# Altium PCB MS1050_EVB_V2.0.PcbDoc
Units mm, origin at the board's own origin, x right, y up, seen from the top; angles counter-clockwise.
Board outline 72.28 x 84 mm, 2 copper layers (Top Layer, Bottom Layer); 37 components, 33 nets, 163 pads, 273 vias.
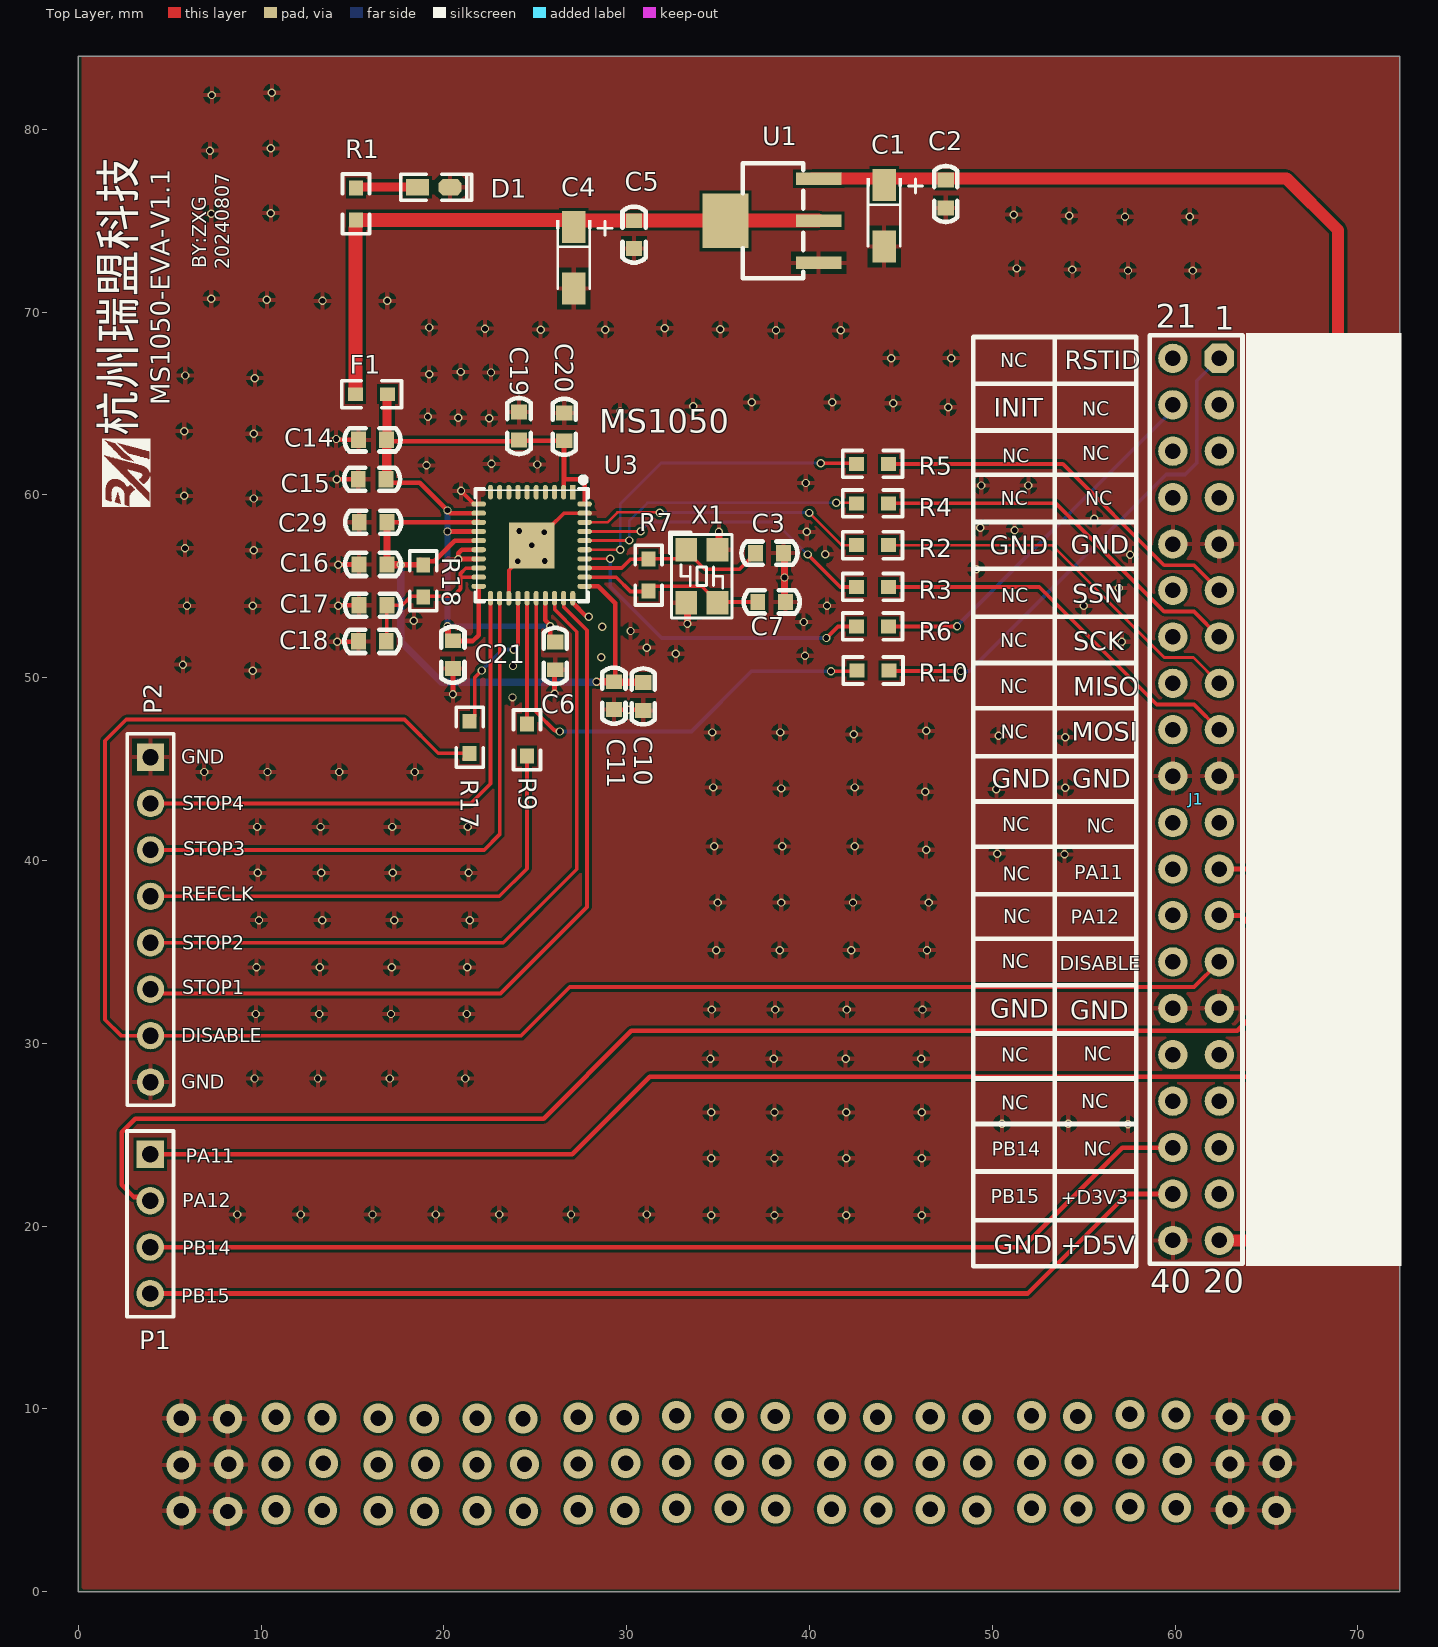
[diagram p0: Top Layer view]
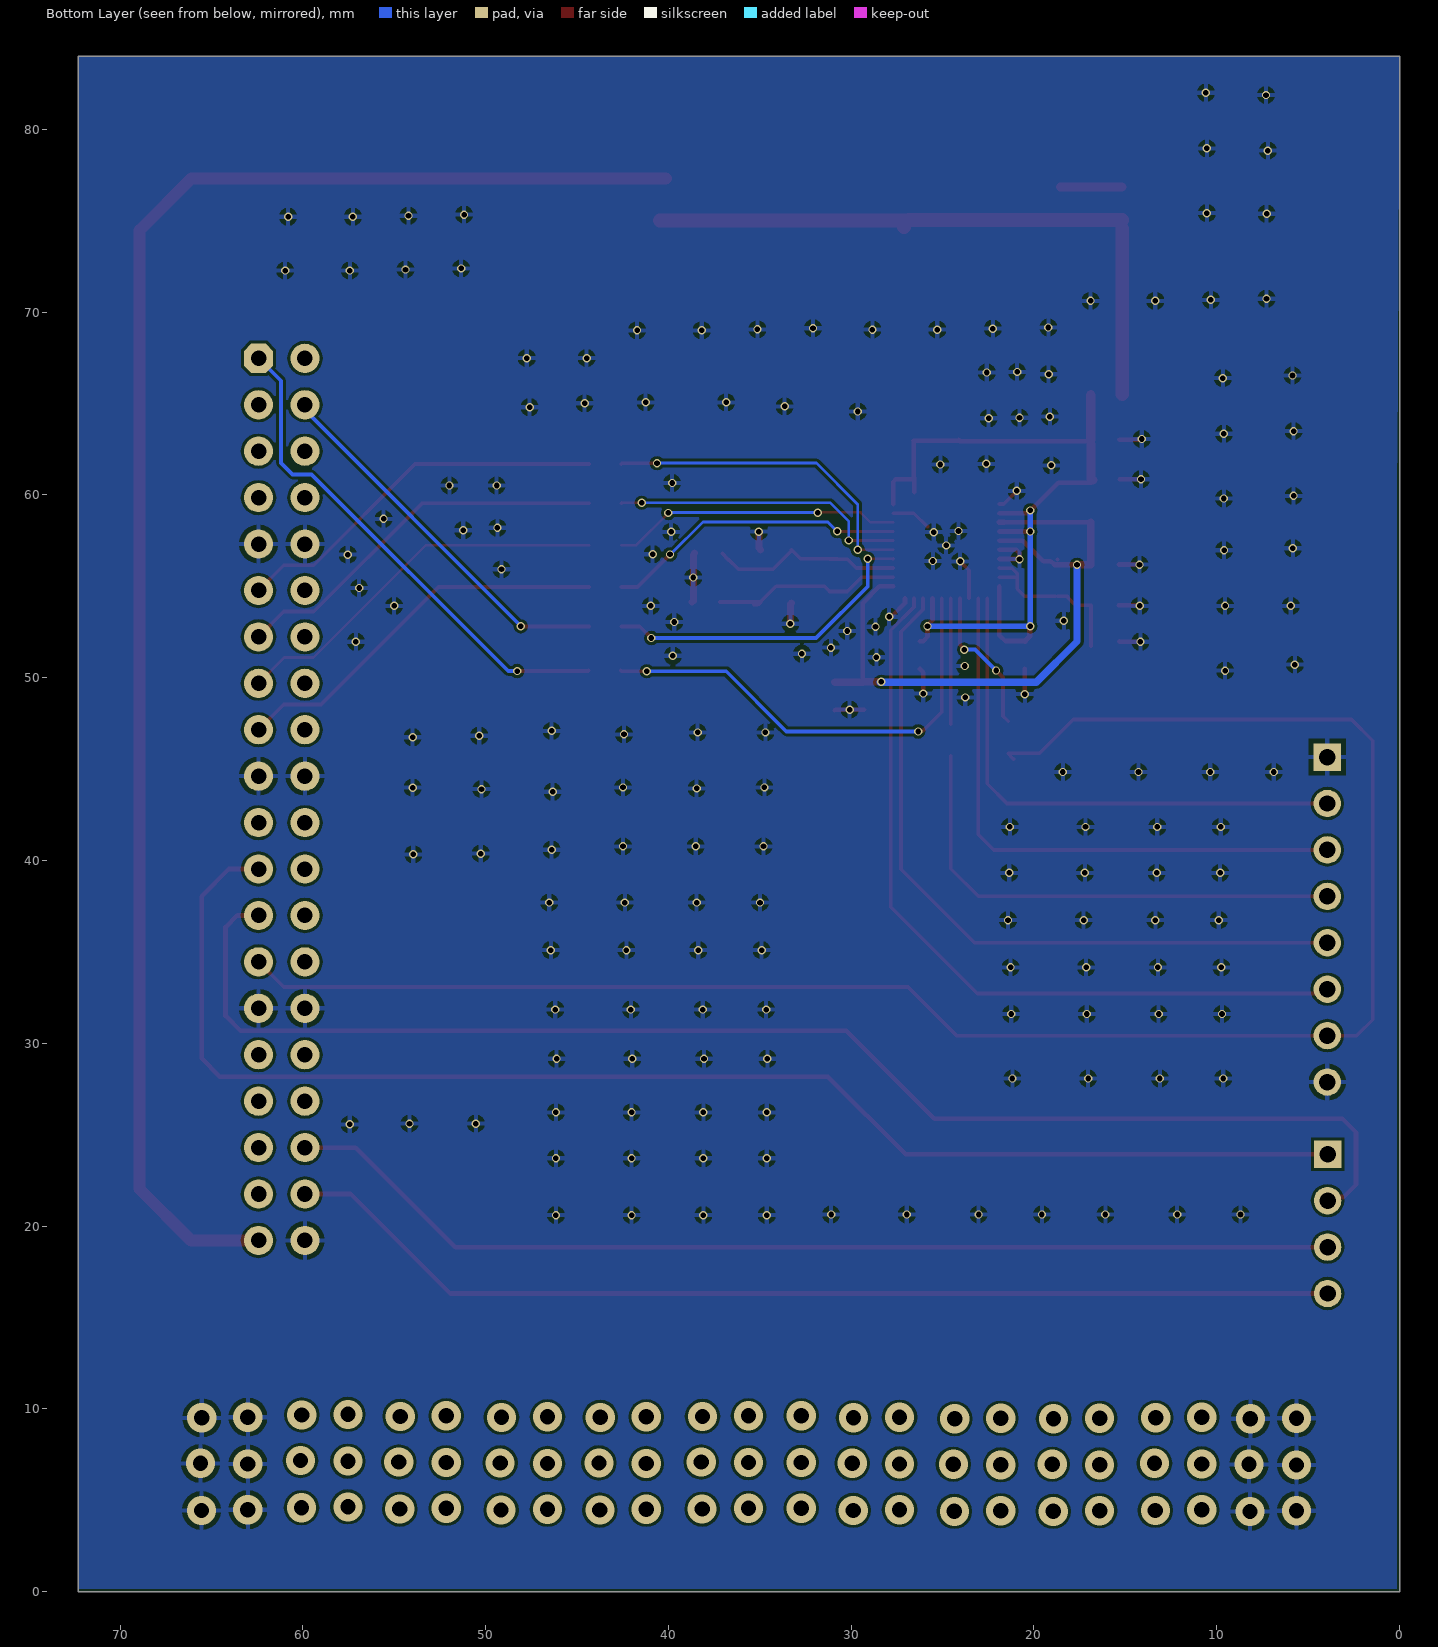
[diagram p1: Bottom Layer view, seen from below]

## Layer stack, top to bottom
Top Solder: solder mask 0.0102, Solder Resist, Dk 3.5
Top Layer: signal copper 0.0356
Dielectric 1: dielectric 0.32, FR-4, Dk 4.8
Bottom Layer: signal copper 0.0356
Bottom Solder: solder mask 0.0102, Solder Resist, Dk 3.5

## Board outline
0,0 72.282,0 72.282,0.031 72.282,84 0,84

## Design rules (kind name [scope] priority, off if disabled: settings)
Clearance [All] p1: gap=0.152 ignorepadtopadclearanceinfootprint=FALSE except(0: Arc-Hole Track-Hole SMDPad-Hole THPad-Hole Via-Hole Fill-Hole Poly-Hole Region-Hole Text-Hole)
MinimumSolderMaskSliver [All] p1: minsoldermaskwidth=0.102
PolygonConnect [All] p1: connectstyle=Relief reliefconductorwidth=0.254 reliefentries=4 polygonreliefangle="90 Angle" airgapwidth=0.254
RoutingVias [All] p1: holewidth=0.711 width=1.27 viastyle="Through Hole" minholewidth=0.711 minwidth=1.27 maxholewidth=0.711 maxwidth=1.27
SilkToSilkClearance [All] p1: silktosilkclearance=0.102
SilkToSolderMaskClearance [IsPad] p1: minsilkscreentomaskgap=0.102 clearancetoexposedcopper=TRUE
SolderMaskExpansion [All] p1: expansion=0.102 istentingtop=FALSE
Width [All] p1: maxlimit=1.27 minlimit=0.152 preferedwidth=0.203
27 further rules are at their usual default settings.

## Components (designator, comment, footprint, x,y, rotation, side; value= is the part's Value field where it differs from the comment)
C1 "22uF" 3216 43.131,79.822 r270 top value=22uF\16V
C2 "0.1uF" 0603C 47.46,75.706 r90 top value=0.1uF\50V
C3 "8pF" 0603C 37.049,56.819 r0 top value=8pF\50V
C4 "22uF" 3216 26.152,77.518 r270 top value=22uF\16V
C5 "0.1uF" 0603c 30.404,73.482 r90 top value=0.1uF\50V
C6 "0.1uF" 0603c 26.096,51.96 r270 top value=0.1uF\50V
C7 "8pF" 0603C 37.175,54.149 r0 top value=8pF\50V
C10 "0.1uF" 0603C 30.904,48.219 r90 top value=0.1uF\50V
C11 "10uF" 0603C 29.301,49.783 r270 top value=10uF\50V
C14 "10uF" 0603C 15.332,63.018 r0 top value=10uF\10V
C15 "0.1uF" 0603C 15.311,60.86 r0 top value=0.1uF\50V
C16 "10uF" 0603C 15.357,56.201 r0 top value=10uF\10V
C17 "10uF" 0603C 15.357,53.966 r0 top value=10uF\10V
C18 "0.1uF" 0603C 15.324,51.993 r0 top value=0.1uF/50V
C19 "10uF" 0603C 24.11,64.535 r270 top value=10uF\10V
C20 "0.1uF" 0603C 26.585,64.494 r270 top value=0.1uF\50V
C21 "10uF" 0603c 20.495,52.022 r270 top value=10uF\10V
C29 "10uF" 0603C 16.897,58.51 r180 top value=10uF\10V
D1 "LED0" "LED 0603R" 19.451,76.833 r0 top
F1 "" R0603 15.169,65.513 r0 top
J1 "I/O" SIP20x2B 61.152,43.346 r270 top
P1 "Header 4" HDR1X4 3.934,23.933 r270 top
P2 "Header 8" HDR1X8 3.95,45.662 r270 top
R1 "1K" R0603 15.192,75.048 r90 top
R2 "0R" R0603 42.58,57.255 r0 top
R3 "0R" R0603 42.58,54.969 r0 top
R4 "0R" R0603 42.58,59.541 r0 top
R5 "0R" R0603 42.58,61.7 r0 top
R6 "0R" R0603 42.58,52.81 r0 top
R7 "1M" R0603 31.197,56.493 r270 top
R9 "Res2" R0603 24.546,45.723 r90 top value=0R
R10 "0R" R0603 42.606,50.397 r0 top
R17 "0R" R0603 21.411,47.619 r270 top
R18 "0R" R0603 18.873,56.176 r270 top
U1 "ASM1117-3.3" 1117 46.656,34.881 r90 top
U3 "MS1050" "QFN40 6X6_L" 24.8,57.255 r180 top
X1 "XTAL_4_PINS" "OSC 4025-4P" 34.11,55.553 r270 top value=8M_3225/+/-20PPM

## Footprints (in the part's own frame and the unit in brackets; to place one, negate y for a bottom-side part, rotate by r counter-clockwise, add the part's x,y. Pads: shape width x height; smd on the part's side, far side on the other; paste and mask are expansions set on the pad)
0603C [mil]
  rect 32x35 smd: 1(0,0) 2(60,0)
  silkscreen extent -30,-25 90,25
0603c [mil]
  rect 32x35 smd: 1(0,0) 2(60,0)
  silkscreen extent -30,-25 90,25
1117 [mm]
  rect 0.7x2.5 smd: 1(37.821,6.152) 2(40.121,6.152) 3(42.421,6.152)
  rect 3x2.5 smd: 2(40.121,11.252)
  silkscreen extent 36.97,7 43.27,10.3
3216 [mm]
  rect 1.758x1.296 smd paste+0 mask+0.051: 1(2.856,0.956) 2(6.228,0.956)
  silkscreen extent 2.48,0 6.22,3.05
HDR1X4 [mm] "Connector; Header; 4 Position"
  rect 1.5x1.5 hole 0.9: 1(0,0)
  round 1.5 hole 0.9: 2(2.54,0) 3(5.08,0) 4(7.62,0)
  silkscreen extent -1.27,-1.27 8.89,1.27
HDR1X8 [mm] "Connector; Header; 8 Position"
  rect 1.5x1.5 hole 0.9: 1(0,0)
  round 1.5 hole 0.9: 2(2.54,0) 3(5.08,0) 4(7.62,0) 5(10.16,0) 6(12.7,0) 7(15.24,0) 8(17.78,0)
  silkscreen extent -1.27,-1.27 19.05,1.27
"LED 0603R" [mil] "红色0603LED"
  rect 50x35 smd: 1(-35,0.26)
  oct 50x35 smd: 2(35,0.26)
  silkscreen extent -71,-28 81,28, body extent -31,-16 31,16, height 18
"OSC 4025-4P" [mm] "4*2.5*0.7mm(长宽高)"
  rect 1.3x1.2 smd: 1(-1.45,-0.85) 2(1.45,-0.85) 3(1.45,0.85) 4(-1.45,0.85)
  silkscreen extent -2.41,-1.75 2.29,1.65, body extent -2,-1.25 2,1.25, height 0.7
"QFN40 6X6_L" [mm] "40脚，长x宽x高：6x6x1mm，脚距：0.5mm"
  rect 0.275x0.8 smd mask+0.051: 1(-2.25,-2.898)
  oval 0.275x0.8 smd mask+0.051: 2(-1.75,-2.898) 3(-1.25,-2.898) 4(-0.75,-2.898) 5(-0.25,-2.898) 6(0.25,-2.898) 7(0.75,-2.898) 8(1.25,-2.898) 9(1.75,-2.898) 10(2.25,-2.898) 21(2.25,2.898) 22(1.75,2.898) 23(1.25,2.898) 24(0.75,2.898) 25(0.25,2.898) 26(-0.25,2.898) 27(-0.75,2.898) 28(-1.25,2.898) 29(-1.75,2.898) 30(-2.25,2.898)
  oval 0.8x0.275 smd mask+0.051: 11(2.898,-2.25) 12(2.898,-1.75) 13(2.898,-1.25) 14(2.898,-0.75) 16(2.898,0.25) 17(2.898,0.75) 18(2.898,1.25) 19(2.898,1.75) 20(2.898,2.25) 31(-2.898,2.25) 32(-2.898,1.75) 33(-2.898,1.25) 34(-2.898,0.75) 35(-2.898,0.25) 36(-2.898,-0.25) 37(-2.898,-0.75) 38(-2.898,-1.25) 39(-2.898,-1.75) 40(-2.898,-2.25)
  oval 0.8x0.275 smd paste+0 mask+0.051: 15(2.898,-0.25)
  rect 2.5x2.5 smd mask+0: ""(-0.007,0.016)
  silkscreen extent -3.1,-3.72 3.1,3.1
R0603 [mil]
  rect 32x30 smd mask+4: 1(0,0) 2(69,0)
  silkscreen extent -30,-29 99,29
SIP20x2B [mm]
  oct 1.6x1.6 hole 0.85: 1(-24.13,1.27)
  round 1.6 hole 0.85: 2(-21.59,1.27) 3(-19.05,1.27) 4(-16.51,1.27) 5(-13.97,1.27) 6(-11.43,1.27) 7(-8.89,1.27) 8(-6.35,1.27) 9(-3.81,1.27) 10(-1.27,1.27) 11(1.27,1.27) 12(3.81,1.27) 13(6.35,1.27) 14(8.89,1.27) 15(11.43,1.27) 16(13.97,1.27) 17(16.51,1.27) 18(19.05,1.27) 19(21.59,1.27) 20(24.13,1.27) 21(-24.13,-1.27) 22(-21.59,-1.27) 23(-19.05,-1.27) 24(-16.51,-1.27) 25(-13.97,-1.27) 26(-11.43,-1.27) 27(-8.89,-1.27) 28(-6.35,-1.27) 29(-3.81,-1.27) 30(-1.27,-1.27) 31(1.27,-1.27) 32(3.81,-1.27) 33(6.35,-1.27) 34(8.89,-1.27) 35(11.43,-1.27) 36(13.97,-1.27) 37(16.51,-1.27) 38(19.05,-1.27) 39(21.59,-1.27) 40(24.13,-1.27)
  silkscreen extent -25.53,-2.54 25.53,11.23

## Part data
C1 C4: library part "Cap Pol2", "Cap，22uF，20%，3216", LatestRevisionDate=17-Jul-2002, LatestRevisionNote="Re-released for DXP Platform.", PackageDescription="Polarized Capacitor; 2 Leads", PackageReference=POLAR0.8, Published=8-Jun-2000, Publisher="Altium Limited"
C2: library part Cap, "Cap，0.1 uF，1%，0603", LatestRevisionDate=17-Jul-2002, LatestRevisionNote="Re-released for DXP Platform.", PackageDescription="Radial Cap, Thru-Hole; 2 Leads; 0.3 in Pin Spacing", PackageReference=RAD-0.3, Published=8-Jun-2000, Publisher="Altium Limited"
C3 C7: library part Cap, "Cap，8pF，1%，0603", LatestRevisionDate=17-Jul-2002, LatestRevisionNote="Re-released for DXP Platform.", PackageDescription="Radial Cap, Thru-Hole; 2 Leads; 0.3 in Pin Spacing", PackageReference=RAD-0.3, Published=8-Jun-2000, Publisher="Altium Limited"
C5 C6 C10 C15 C18 C20: library part Cap, "Cap，0.1uF，1%，0603", LatestRevisionDate=17-Jul-2002, LatestRevisionNote="Re-released for DXP Platform.", PackageDescription="Radial Cap, Thru-Hole; 2 Leads; 0.3 in Pin Spacing", PackageReference=RAD-0.3, Published=8-Jun-2000, Publisher="Altium Limited"
C11 C14 C16 C17 C19 C21 C29: library part Cap, "Cap，10 uF，1%，0603", LatestRevisionDate=17-Jul-2002, LatestRevisionNote="Re-released for DXP Platform.", PackageDescription="Radial Cap, Thru-Hole; 2 Leads; 0.3 in Pin Spacing", PackageReference=RAD-0.3, Published=8-Jun-2000, Publisher="Altium Limited"
D1: "Green LED", LatestRevisionDate=08-Jul-2005, LatestRevisionNote="Mech Layer 1 removed.", PackageDescription="LED; 2 Leads", PackageReference=LED-0, Published=8-Jun-2000, Publisher="Altium Limited"
F1: library part Inductor, "Inductor", Code_IEC=1005, Code_JEITA=0402, LatestRevisionDate=29-May-2009, LatestRevisionNote="IPC-7351 Footprint Added.", PackageDescription="Chip Inductor", PackageReference=0402-A, Published=8-Jun-2000, Publisher="Altium Limited"
J1: library part "Header 20X2A", "Header, 40-Pin, Dual row"
P1: "Header, 4-Pin", LatestRevisionDate=17-Jul-2002, LatestRevisionNote="Re-released for DXP Platform.", Publisher="Altium Limited"
P2: "Header, 8-Pin", LatestRevisionDate=17-Jul-2002, LatestRevisionNote="Re-released for DXP Platform.", Publisher="Altium Limited"
R1: library part RES2, "RES，1.00K ohm，1%，0.125W，0603"
R2 R3 R4 R5 R6 R10 R17 R18: library part RES2_1, "RES，0 ohm，1%，0.125W，0603"
R7: library part Res2, "RES，1M ohm，1%，0.125W，0603", LatestRevisionDate=17-Jul-2002, LatestRevisionNote="Re-released for DXP Platform.", PackageDescription="Axial Device, Thru-Hole; 2 Leads; 0.4 in Pin Spacing", PackageReference=AXIAL-0.4, Published=8-Jun-2000, Publisher="Altium Limited"
R9: library part Res2_3, "Resistor", LatestRevisionDate=17-Jul-2002, LatestRevisionNote="Re-released for DXP Platform.", PackageDescription="Axial Device, Thru-Hole; 2 Leads; 0.4 in Pin Spacing", PackageReference=AXIAL-0.4, Published=8-Jun-2000, Publisher="Altium Limited"
U1: library part REG1117-3.3, "800mA and 1A Low Dropout Positive Regulator 2.85V, 3.3V, 5V, and Adjustable", ComponentLink1Description="Manufacturer Link", ComponentLink1URL=http://www.ti.com/, ComponentLink2Description=Datasheet, ComponentLink2URL=http://www-s.ti.com/sc/ds/REG1117.pdf, DatasheetVersion=Sep-1997, LatestRevisionDate=17-Jul-2002, LatestRevisionNote="Re-released for DXP Platform.", PackageDescription="SOT-223/SC-73; 4 Leads; Body 6.7 x 7.3 mm, inc. leads (LxW max)", PackageReference=ZZ311, PackageVersion=revC, Published=8-Jun-2000, Publisher="Altium Limited"
X1: "SMD3225, 8MHz, 12pF 10%", Manufacturer=SJK, Package="(2016) 2.0 x 1.6 x 0.45 mm", PartNumber=7U08000E12UCG

## Via types
v1: diameter 0.457, hole 0.305, Top Layer to Bottom Layer, tented both sides, 198 vias
v2: diameter 1.6, hole 0.838, Top Layer to Bottom Layer, 69 vias
v3: diameter 0.457, hole 0.305, Top Layer to Bottom Layer, 6 vias

## Nets (pads, with @x,y where several pads share a name; then routed paths per layer and width w, separated by ;. In a path a pad name is that pad's centre, name@x,y a point inside that pad or via, vN(x,y) a via of type N, cw(c..) or ccw(c..) an arc to the next point about the centre after c; other vN are vias at no path point)
+D5V: C1.1 C2.2 J1.20 U1.3 | length 90.1
  Top Layer w0.66: U1.3@40.14,77.317 44.087,77.317 46.505,77.317 47.464,77.317 66.095,77.317 68.926,74.486 68.926,22.021 66.121,19.216 J1.20
DISABLE: J1.14 P2.7 R17.2 | length 99.9
  Top Layer w0.203: R17.2@21.106,45.562 21.131,45.562 R17.2@21.411,45.841 ; R17.2 19.698,45.866 17.85,47.714 2.626,47.714 1.465,46.553 1.465,31.293 2.337,30.422 P2.7 24.232,30.422 26.888,33.077 61.043,33.077 J1.14
DVDD18O: C10.2 C11.1 C16.2 C29.1 R18.1 U3.13 U3.15 U3.31 | length 38.6
  Top Layer w0.203: R18.1@18.697,56.471 R18.1@18.723,56.471
  Top Layer w0.254: C29.1 U3.13@21.654,58.51 ; R18.1@18.872,56.176 19.081,56.385 19.483,56.385 20.603,57.505 U3.15 ; U3.31 28.455,55.005 29.372,54.087 C11.1@29.372,49.762
  Top Layer w0.305: v1(17.643,56.176) R18.1@18.872,56.176 ; U3.13@21.654,58.51 21.659,58.505 U3.13
  Top Layer w0.406: C16.2@16.881,56.176 v1(17.643,56.176) ; C16.2 16.889,56.209 16.889,58.502 C29.1 ; C11.1@29.301,49.774 28.358,49.774 v1(28.348,49.783) C11.1 ; C11.1@29.372,49.752 30.895,49.752 C10.2
  Bottom Layer w0.406: v1(17.643,56.176) 17.643,51.987 19.868,49.762 v1@28.42,49.762
DVDD33: C6.1 C14.2 C15.2 C19.2 C20.2 C21.1 F1.2 U3.2 U3.12 U3.14 U3.20 U3.27 U3.40 | length 46.8
  Top Layer w0.102: U3.20 U3.20@21.924,55.027
  Top Layer w0.203: U3.2 U3.2@26.557,60.16 ; 26.55,60.938 26.557,60.931 26.57,60.918
  Top Layer w0.254: C14.2 16.928,62.946 24.045,62.946 C19.2 ; C15.2@16.881,60.671 18.674,60.671 20.34,59.005 U3.12 ; v1@20.197,58.002 21.899,58.002 U3.14 ; C21.1@20.49,52.012 21.578,52.012 21.902,52.336 U3.20 ; C19.2@24.11,62.97 C20.2 ; U3.27 25.55,53.14 25.825,52.866 25.825,52.24 26.062,52.002 C6.1@26.233,52.002 ; U3.2@26.557,60.16 26.557,60.931 ; C20.2@26.57,62.912 26.57,60.918 26.628,60.86 27.55,60.86 27.699,60.711 U3.40
  Top Layer w0.305: v3(20.197,52.81) 20.226,52.781 20.226,52.276 C21.1@20.49,52.012
  Top Layer w0.508: C15.2@16.79,60.815 C15.2 16.881,60.905 C14.2@16.881,62.792 ; C14.2@16.888,63.018 F1.2@16.888,65.479
  Bottom Layer w0.254: v1(20.196,58.002) v1(20.196,58.002)
  Bottom Layer w0.305: v3(20.197,52.81) 20.197,57.971 v1(20.197,59.155) ; v3(20.197,52.81) v3@25.824,52.81
  other v3: 25.825,52.811
GND: C1.2 C2.1 C3.2 C4.2 C5.1 C6.2 C7.2 C10.1 C11.2 C14.1 C15.1 C16.1 C17.1 C18.1 C19.1 C20.1 C21.2 C29.2 D1.2 J1.5 J1.10 J1.15 J1.25 J1.30 J1.35 J1.40 P2.1 P2.8 U1.1 U3. U3.11 U3.16 U3.17 U3.23 U3.30 U3.39 X1.2 X1.4 | length 25
  Top Layer w0.152: v3(20.789,56.493) v3@20.795,56.499 ; U3.17@21.896,56.499 U3.17
  Top Layer w0.203: v1(20.94,60.226) 20.94,60.215 21.65,59.505 U3.11 ; U3.23 23.557,54.363 23.557,55.885 v1(24.038,56.366) ; U3.@25.816,58.271 25.839,58.271 26.573,59.005 U3.39
  Top Layer w0.254: v1(14.105,63.064) 14.151,63.018 C14.1 ; v1(14.144,60.864) 14.149,60.86 C15.1 ; v1(14.174,51.972) 15.304,51.972 C18.1 ; v1(14.214,53.931) 14.249,53.966 C17.1 ; v1(14.224,56.193) 14.232,56.201 C16.1 ; C21.2 v3(20.495,49.107) v3@20.518,49.084 ; v3(20.789,56.493) 20.789,56.819 20.975,57.005 U3.16 ; v3@20.795,56.499 U3.17@21.896,56.499 ; v1(26.055,49.137) 26.055,50.301 C6.2@26.233,50.478 ; U3.30 27.05,54.094 27.765,53.38 27.884,53.38 v1(27.923,53.341) ; C11.2 30.864,48.259 C10.1
  Top Layer w0.381: X1.2 33.326,54.036 v3(33.326,52.956) ; X1.4 35.048,57.092 v3(35.048,57.999) ; C3.2 38.636,56.756 38.636,54.212 C7.2
  other v1: 34.619,20.601 38.087,20.601 42.014,20.601 46.152,20.601 8.699,20.636 12.167,20.636 16.094,20.636 19.563,20.636 23.031,20.636 26.958,20.636 31.096,20.636 34.619,23.71 38.087,23.71 42.014,23.71 46.152,23.71 57.43,25.567 50.533,25.607 54.163,25.607 34.619,26.225 38.087,26.225 42.014,26.225 46.152,26.225 9.642,28.076 13.11,28.076 17.038,28.076 21.175,28.076 34.584,29.159 38.052,29.159 41.979,29.159 46.117,29.159 9.712,31.605 13.18,31.605 17.108,31.605 21.245,31.605 34.654,31.849 38.122,31.849 42.049,31.849 46.187,31.849 9.747,34.155 13.215,34.155 17.142,34.155 21.28,34.155 34.898,35.098 38.366,35.098 42.294,35.098 46.431,35.098 9.886,36.74 13.355,36.74 17.282,36.74 21.419,36.74 34.987,37.702 38.455,37.702 42.382,37.702 46.52,37.702 9.816,39.325 13.285,39.325 17.212,39.325 21.35,39.325 53.954,40.34 50.266,40.381 46.386,40.59 34.797,40.774 38.506,40.774 42.483,40.774 9.782,41.84 13.25,41.84 17.177,41.84 21.315,41.84 46.332,43.761 50.225,43.907 38.452,43.945 34.743,43.999 42.483,43.999 53.994,43.988 6.882,44.844 10.35,44.844 14.278,44.844 18.415,44.844 53.994,46.744 50.347,46.825 42.429,46.901 34.689,47.009 38.398,47.009 46.386,47.094 30.083,48.259 23.754,48.923 9.543,50.39 23.782,50.643 5.725,50.722 28.617,51.122 39.757,51.205 32.691,51.313 31.106,51.652 57.096,51.972 30.213,52.56 28.667,52.792 39.68,53.053 18.36,53.118 5.946,53.932 9.543,53.932 40.96,53.933 55.004,53.931 56.918,54.91 38.636,55.484 49.129,55.934 25.528,56.389 57.541,56.735 40.86,56.757 9.599,56.976 5.835,57.087 24.807,57.239 25.485,57.971 39.851,57.984 24.127,58.031 51.221,58.07 49.351,58.204 55.583,58.694 9.606,59.807 5.797,59.952 49.396,60.519 51.977,60.519 39.796,60.657 19.047,61.618 25.117,61.669 22.605,61.7 9.606,63.349 5.797,63.494 22.482,64.198 20.789,64.229 19.127,64.29 29.639,64.566 47.589,64.8 33.638,64.847 44.579,65.015 36.839,65.069 41.247,65.069 9.661,66.393 5.853,66.538 19.194,66.609 22.579,66.701 20.917,66.732 44.472,67.488 47.751,67.488 38.171,69.008 41.713,69.008 25.293,69.049 28.835,69.049 35.127,69.063 22.249,69.104 32.086,69.124 19.208,69.165 13.361,70.622 16.903,70.622 10.317,70.677 7.276,70.738 57.426,72.279 60.968,72.279 54.382,72.334 51.341,72.395 57.263,75.222 60.805,75.222 54.219,75.277 51.178,75.338 7.27,75.388 10.536,75.419 7.201,78.842 10.536,78.961 7.305,81.881 10.591,82.005
  other v2: 8.178,4.39 5.638,4.429 65.546,4.443 63.006,4.483 5.638,6.934 8.231,6.967 63.006,6.987 65.599,7.02 8.158,9.458 5.638,9.491 65.526,9.512 63.006,9.545
INTN: J1.22 R6.2 | length 20.8
  Top Layer w0.203: R6.2 v1(48.077,52.81)
  Bottom Layer w0.203: v1(48.077,52.81) 48.077,52.837 59.882,64.643 J1.22
MISO: J1.8 R2.2 | length 21.2
  Top Layer w0.152: R2.2 53.266,57.255 59.414,51.106 61.013,51.106 J1.8
MOSI: J1.9 R3.2 | length 21.3
  Top Layer w0.203: R3.2 52.572,54.969 59,48.541 61.038,48.541 J1.9
NetC3_1: C3.1 R7.1 U3.33 X1.1 | length 10.7
  Top Layer w0.203: U3.33 29.726,56.005 30.206,56.485 30.729,56.485 30.737,56.493 R7.1 31.209,56.504 32.761,56.504 X1.1 33.26,56.953 34.274,55.938 36.168,55.938 36.707,56.476 36.745,56.476 37.049,56.781 C3.1 C3.1@36.961,56.731
NetC4_1: C4.1 C5.2 F1.1 R1.1 U1.2 | length 34.6
  Top Layer w0.762: F1.1 15.169,74.571 ; R1.1 26.841,75.048 27.108,74.781 C4.1 ; C4.1@27.108,75.017 30.404,75.017 U1.2@40.473,75.017
NetC7_1: C7.1 R7.2 U3.32 X1.3 | length 10.8
  Top Layer w0.203: U3.32 27.706,55.498 29.427,55.498 30.21,54.715 R7.2@31.197,54.715 ; R7.2 31.464,55.007 34.106,55.007 34.985,54.128 35.107,54.005 X1.3@35.321,54.005 ; X1.3@35.034,54.029 X1.3 35.006,54.149 C7.1
NetC17_2: C17.2 C18.2 R18.2 U3.18 U3.19 | length 9.5
  Top Layer w0.203: C18.2@16.881,51.731 C17.2 17.719,53.966 18.151,54.398 ; 18.151,54.461 R18.2@18.704,54.461 ; R18.2@18.799,54.466 20.515,54.466 20.912,54.863 20.912,55.505 ; U3.19 20.912,55.505 ; U3.18 21.888,55.991 21.201,55.991 20.912,55.702 20.912,55.505
NetD1_1: D1.1 R1.2 | length 3.4
  Top Layer w0.508: R1.2@15.192,76.85 D1.1@18.551,76.85
NetR2_1: R2.1 U3.38 | length 15.9
  Top Layer w0.152: U3.38 28.948,58.505 29.494,59.05 31.805,59.05 v1(31.82,59.036) ; v1(39.998,59.017) 41.76,57.255 R2.1
  Bottom Layer w0.152: v1(31.82,59.036) 39.979,59.036 v1(39.998,59.017)
NetR3_1: R3.1 U3.37 | length 16.6
  Top Layer w0.152: U3.37 27.703,58.009 30.762,58.009 v1(30.766,58.013)
  Top Layer w0.203: v1(39.911,56.746) 41.688,54.969 R3.1
  Bottom Layer w0.152: v1(30.766,58.013) 31.283,58.53 38.112,58.53 39.896,56.746 v1(39.911,56.746)
NetR4_1: R4.1 U3.36 | length 16.4
  Top Layer w0.152: U3.36 27.703,57.509 30.132,57.509 v1(30.137,57.514) ; v1(41.457,59.572) R4.1@42.549,59.572
  Top Layer w0.203: R4.1@42.549,59.572 R4.1
  Bottom Layer w0.152: v1(30.137,57.514) 30.137,58.569 31.139,59.572 v1(41.457,59.572)
NetR5_1: R5.1 U3.35 | length 18.3
  Top Layer w0.152: U3.35@27.703,57 29.639,57 v1(29.643,56.996)
  Top Layer w0.203: v1(40.622,61.744) 42.536,61.744 R5.1
  Bottom Layer w0.152: v1(29.643,56.996) 29.643,59.497 31.891,61.744 v1(40.622,61.744)
NetR6_1: R6.1 U3.34 | length 17.8
  Top Layer w0.152: U3.34@27.703,56.509 29.094,56.509 v1(29.098,56.513)
  Top Layer w0.203: U3.34 U3.34@27.703,56.509 ; v1(40.929,52.175) 41.564,52.81 R6.1
  Bottom Layer w0.203: v1(29.098,56.513) 29.098,54.998 31.921,52.175 v1(40.929,52.175)
NetR9_2: R9.2 U3.25 | length 6.9
  Top Layer w0.203: R9.2 24.55,47.48 U3.25
NetR10_1: R10.1 U3.26 | length 25.6
  Top Layer w0.203: U3.26 25.05,48.118 26.058,47.111 26.283,47.111 v1(26.332,47.062) ; v1(41.18,50.352) 42.561,50.352 R10.1
  Bottom Layer w0.203: v1(26.332,47.062) 33.545,47.062 36.835,50.352 v1(41.18,50.352)
NetR17_1: R17.1 U3.24 | length 8.2
  Top Layer w0.203: R17.1 21.69,47.898 21.69,50.013 v1(22.073,50.397) ; v1(23.815,51.542) 23.815,51.569 24.05,51.804 U3.24
  Bottom Layer w0.203: v1(22.073,50.397) 23.218,51.542 v1(23.815,51.542)
PA11: J1.12 P1.1 | length 76.4
  Top Layer w0.254: P1.1 27.022,23.933 31.27,28.181 64.539,28.181 65.533,29.175 65.533,38.05 64.046,39.536 J1.12
PA12: J1.13 P1.2 | length 76.2
  Top Layer w0.254: P1.2 3.734,21.593 3.043,21.593 2.381,22.255 2.381,25.143 3.12,25.882 25.46,25.882 30.261,30.682 31.09,30.682 63.41,30.682 64.227,31.499 64.227,36.363 63.593,36.996 J1.13
PB14: J1.38 P1.3 | length 58.2
  Top Layer w0.254: P1.3 51.668,18.853 57.112,24.296 J1.38
PB15: J1.39 P1.4 | length 58.2
  Top Layer w0.254: P1.4 51.934,16.313 57.378,21.756 J1.39
REFCLK: P2.4 R9.1 | length 27.4
  Top Layer w0.203: P2.4 23.031,38.042 24.546,39.556 R9.1
RSTIDX: J1.1 R10.2 | length 27.8
  Top Layer w0.203: R10.2 44.387,50.368 v1(48.275,50.368)
  Bottom Layer w0.203: v1(48.275,50.368) 48.76,50.368 59.518,61.126 60.566,61.126 61.194,61.755 61.194,66.248 J1.1
SCK: J1.7 R4.2 | length 21.1
  Top Layer w0.203: R4.2 53.484,59.541 59.404,53.621 61.038,53.621 J1.7
SSN: J1.6 R5.2 | length 21
  Top Layer w0.203: R5.2 53.865,61.7 59.404,56.161 61.038,56.161 J1.6
STOP1: P2.6 U3.29 | length 43.4
  Top Layer w0.203: P2.6 4.188,32.723 23.095,32.723 27.831,37.459 27.831,52.604 26.564,53.871 26.564,54.343 U3.29
STOP2: P2.5 U3.28 | length 40.3
  Top Layer w0.203: P2.5 23.244,35.502 27.269,39.526 27.269,52.523 26.064,53.728 26.064,54.343 U3.28
STOP3: P2.3 U3.22 | length 32.4
  Top Layer w0.203: P2.3 22.203,40.582 23.05,41.429 U3.22
STOP4: P2.2 U3.21 | length 29.2
  Top Layer w0.203: P2.2 21.47,43.122 22.556,44.208 22.556,54.351 U3.21
pads on no net: J1.2 J1.3 J1.4 J1.11 J1.16 J1.17 J1.18 J1.19 J1.21 J1.23 J1.24 J1.26 J1.27 J1.28 J1.29 J1.31 J1.32 J1.33 J1.34 J1.36 J1.37 U3.1 U3.3 U3.4 U3.5 U3.6 U3.7 U3.8 U3.9 U3.10
copper on no net:
  other v2: 18.946,4.393 24.353,4.393 13.354,4.446 16.406,4.433 21.813,4.433 29.892,4.446 43.746,4.466 49.153,4.466 10.814,4.486 27.352,4.486 41.206,4.506 46.613,4.506 38.154,4.519 54.692,4.519 35.614,4.559 52.152,4.559 32.732,4.566 60.072,4.599 57.532,4.638 16.406,6.937 21.813,6.937 18.999,6.971 24.406,6.971 10.814,6.99 27.352,6.99 41.206,7.01 46.613,7.01 13.407,7.024 29.945,7.024 43.799,7.044 49.206,7.044 32.732,7.07 35.614,7.063 52.152,7.063 38.207,7.097 54.745,7.097 57.532,7.143 60.125,7.176 18.926,9.462 24.333,9.462 16.406,9.495 21.813,9.495 13.334,9.515 29.872,9.515 43.726,9.535 49.133,9.535 10.814,9.548 27.352,9.548 38.134,9.588 41.206,9.568 46.613,9.568 54.672,9.588 32.732,9.628 35.614,9.621 52.152,9.621 60.052,9.667 57.532,9.7

## Polygon pours and split planes (outlines as drawn)
GND on Bottom Layer "GND_L02_P007" (solid, remove dead copper, pour order 7): 0.129,61.766 0.142,61.753 0.142,0.161 72.282,0.161 72.282,9.596 72.282,84 0,84 0.129,61.753
GND on Top Layer "GND_L01_P005" (solid, remove dead copper, pour order 5): 0.182,84 0.182,61.846 0.182,0.135 72.282,0.147 72.282,0.135 72.282,9.755 72.282,84

## Other copper
Top Layer:
  pour cut-out: 26.573,59.367 26.569,59.492 26.397,59.522 26.3,59.587 22.8,59.587 22.707,59.494 22.561,59.494 22.561,59.38 22.533,59.352 22.543,59.342 22.543,59.328 22.62,59.328 23.079,58.869 23.079,58.022 22.728,57.671 22.625,57.671 22.625,57.613 22.468,57.456 22.468,57.255 22.419,57.255 22.296,57.132 22.468,56.96 22.468,56.255 22.468,55.109 22.654,54.923 23.002,54.923 23.17,55.091 23.188,55.091 23.188,56.132 23.303,56.248 23.303,58.743 25.798,58.743 26.434,59.34
  pour cut-out: 26.311,58.23 26.723,58.642 26.964,58.642 27.037,58.569 27.037,58.536 27.045,58.544 27.132,58.457 27.132,57.755 27.132,56.755 27.132,55.755 27.132,55.109 26.946,54.923 24.099,54.923 23.93,55.091 23.913,55.091 23.913,55.735 26.311,55.735

## Silkscreen, mask and mechanical layers (free items; w line width, h text height)
Top Overlay:
  drawing of 1093 lines, arcs and shapes, not listed
  text "BY:ZXG" at 7,72.403 h0.76 r90
  text "20240807" at 8.258,72.364 h0.76 r90
  text "NC" at 50.427,66.983 h0.76
  text "RSTID" at 53.972,66.879 h1.02
  text "MS1050-EVA-V1.1" at 5.355,64.912 h1.78 r90
  text "NC" at 54.916,64.338 h0.76
  text "INIT" at 50.087,64.283 h1.02
  text "杭州瑞盟科技" at 3.69,63.209 h3.18 r90
  text "NC" at 54.936,61.893 h0.76
  text "NC" at 50.547,61.773 h0.76
  text "NC" at 50.467,59.428 h0.76
  text "NC" at 55.076,59.428 h0.76
  text "GND" at 54.309,56.785 h1.02
  text "GND" at 49.86,56.745 h1.02
  text "NC" at 50.487,54.137 h0.76
  text "SSN" at 54.375,54.094 h1.02
  text "NC" at 50.447,51.672 h0.76
  text "SCK" at 54.44,51.499 h1.02
  text "NC" at 50.427,49.147 h0.76
  text "MISO" at 54.44,49.016 h1.02
  text "NC" at 50.467,46.662 h0.76
  text "MOSI" at 54.343,46.549 h1.02
  text "GND" at 5.626,45.306 h0.76
  text "GND" at 49.974,43.97 h1.02
  text "GND" at 54.391,43.97 h1.02
  text "STOP4" at 5.687,42.739 h0.76
  text "NC" at 50.547,41.611 h0.76
  text "NC" at 55.176,41.531 h0.76
  text "STOP3" at 5.746,40.264 h0.76
  text "PA11" at 54.496,38.983 h0.76
  text "NC" at 50.567,38.886 h0.76
  text "REFCLK" at 5.626,37.813 h0.76
  text "NC" at 50.607,36.581 h0.76
  text "PA12" at 54.291,36.543 h0.76
  text "STOP2" at 5.687,35.108 h0.76
  text "NC" at 50.527,34.116 h0.76
  text "DISABLE" at 53.694,33.996 h0.76
  text "STOP1" at 5.687,32.691 h0.76
  text "GND" at 49.893,31.395 h1.02
  text "GND" at 54.278,31.314 h1.02
  text "DISABLE" at 5.626,30.066 h0.76
  text "NC" at 54.996,29.046 h0.76
  text "NC" at 50.487,29.006 h0.76
  text "GND" at 5.626,27.526 h0.76
  text "NC" at 54.876,26.461 h0.76
  text "NC" at 50.487,26.36 h0.76
  text "PB14" at 49.971,23.855 h0.76
  text "NC" at 55.016,23.855 h0.76
  text "PA11" at 5.88,23.48 h0.76
  text "PB15" at 49.931,21.25 h0.76
  text "+D3V3" at 53.763,21.206 h0.76
  text "PA12" at 5.675,21.04 h0.76
  text "GND" at 50.071,18.497 h1.02
  text "+D5V" at 53.763,18.449 h1.02
  text "PB14" at 5.674,18.426 h0.76
  text "PB15" at 5.634,15.82 h0.76
Mechanical 1:
  lines w0.254: 72.282,0 0,0 0,84 72.282,84 72.282,0.031

## Dimensions
0,0 to 0,84 on Mechanical 1
0,0 to 72.282,0 on Mechanical 1

## Text inside footprints (layer, text, board x,y; h text height)
J1: Top Overlay "1" at 62.152,69.046 h1.27; Top Overlay "20" at 61.552,16.346 h1.27; Top Overlay "40" at 58.652,16.346 h1.27; Top Overlay "21" at 58.952,69.146 h1.27